# Altium PCB receiver.PcbDoc
Units mm, origin at the board's own origin, x right, y up, seen from the top; angles counter-clockwise.
Board outline 67.6 x 51.9 mm, 2 copper layers (Top Layer, Bottom Layer), stack 1.671 mm thick; 9 components, 15 nets, 25 pads, 3 vias.
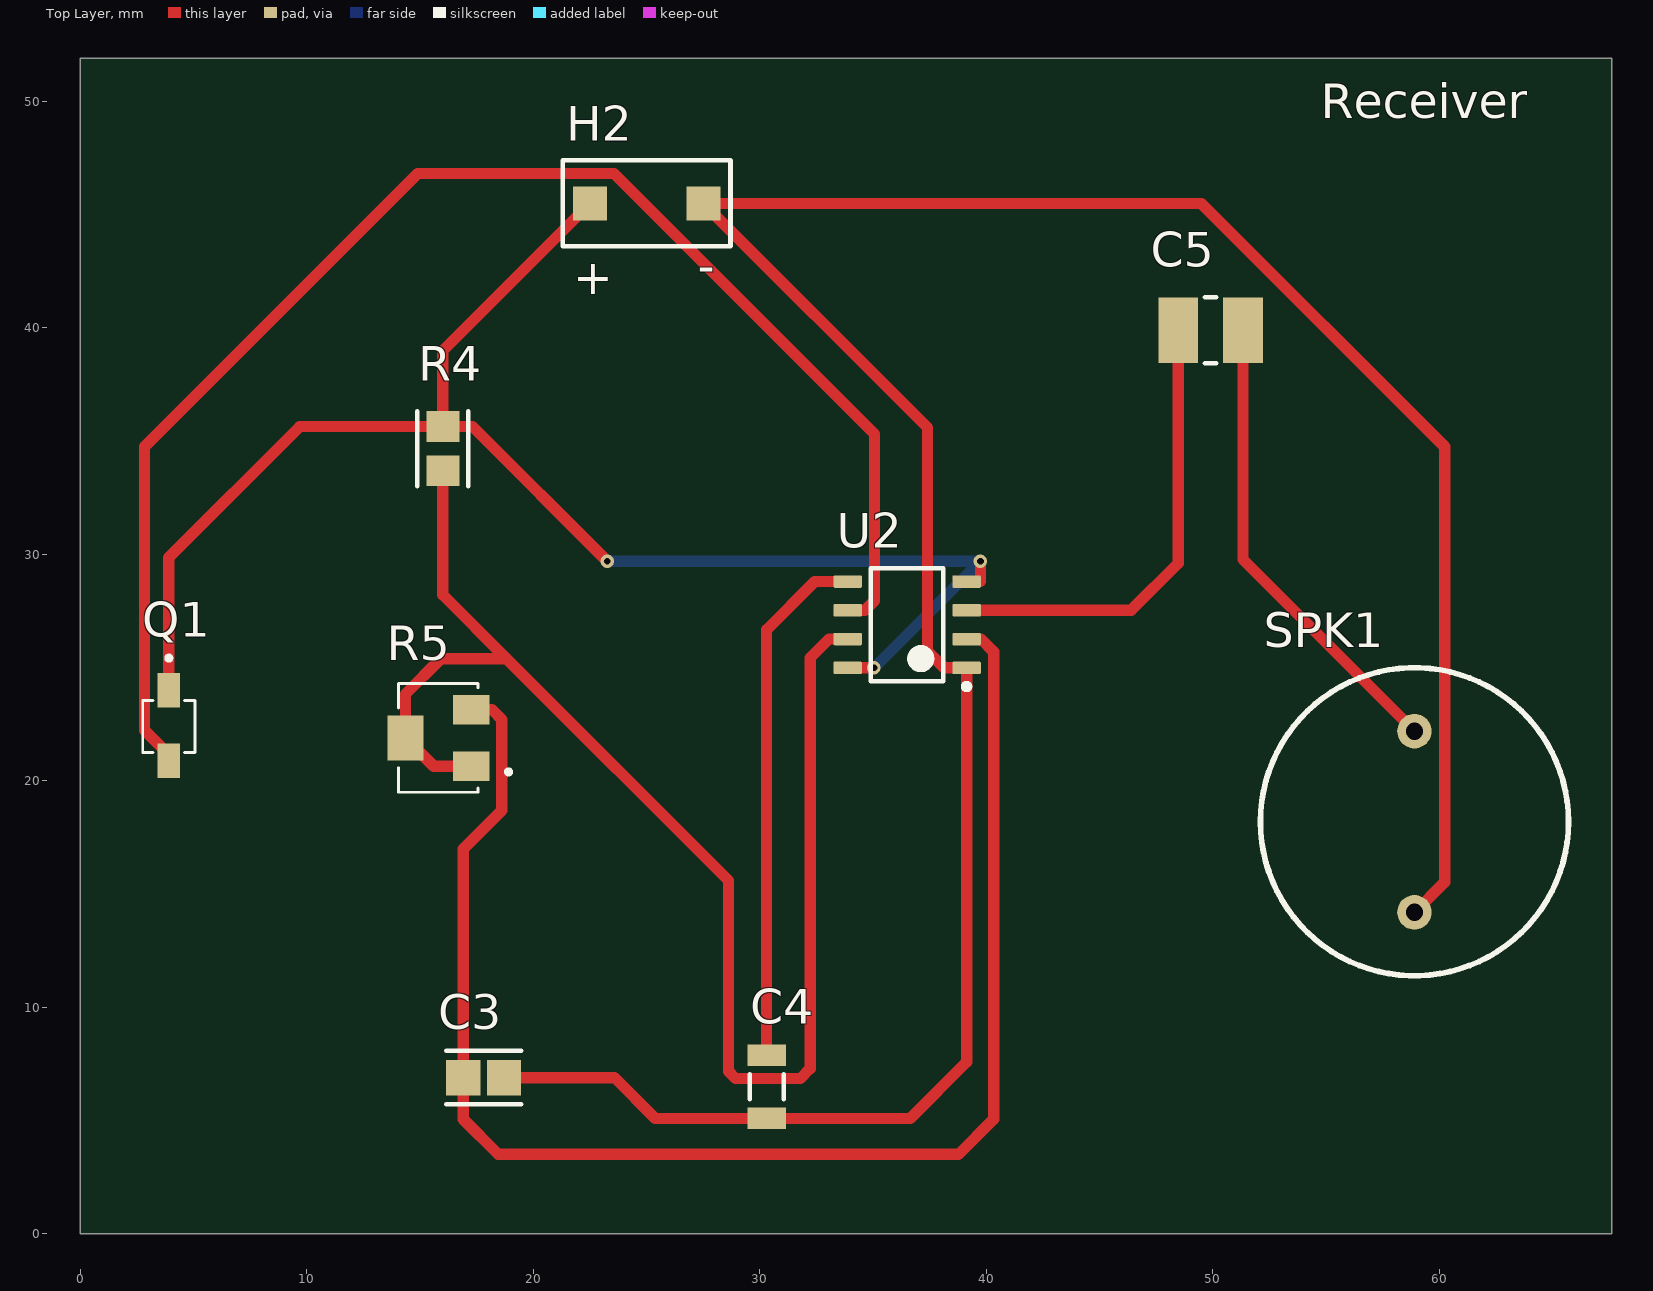
[diagram p0: Top Layer view]
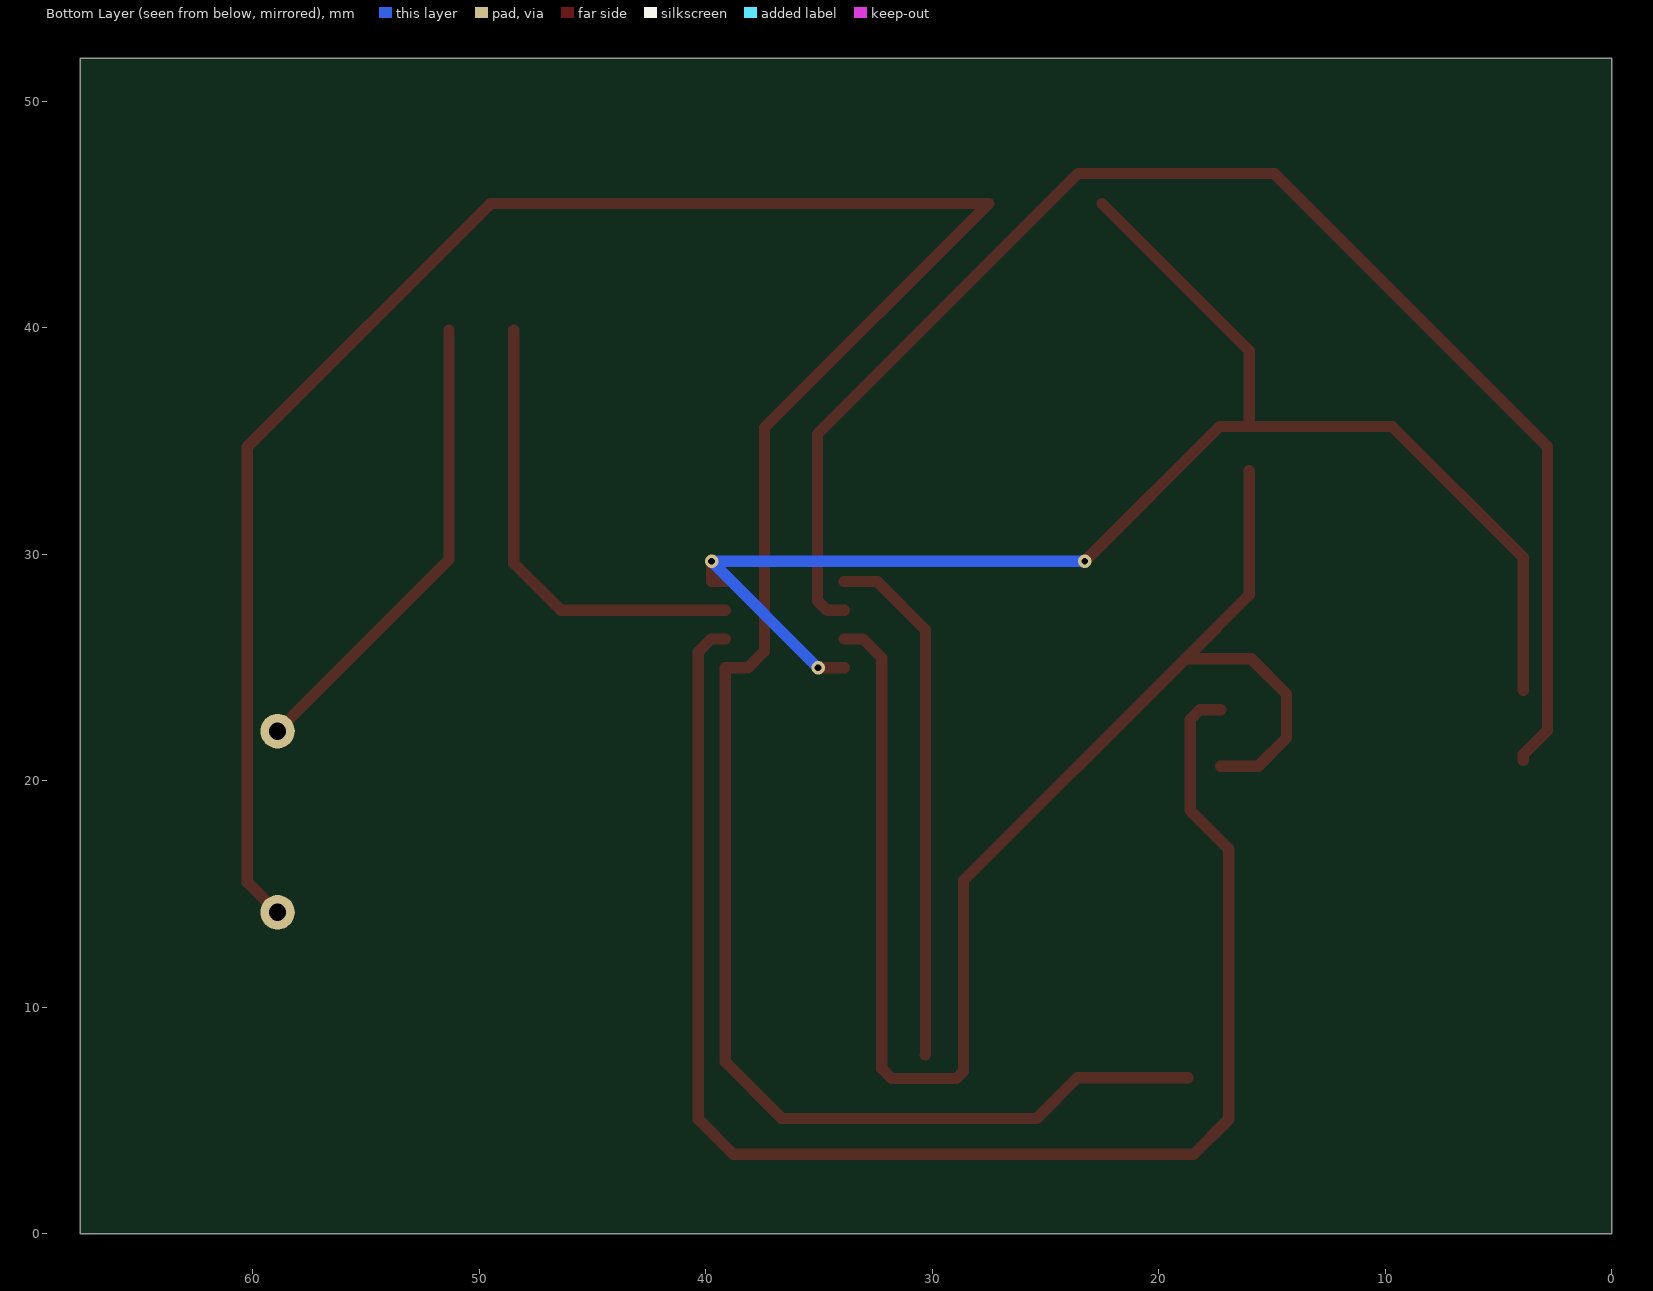
[diagram p1: Bottom Layer view, seen from below]
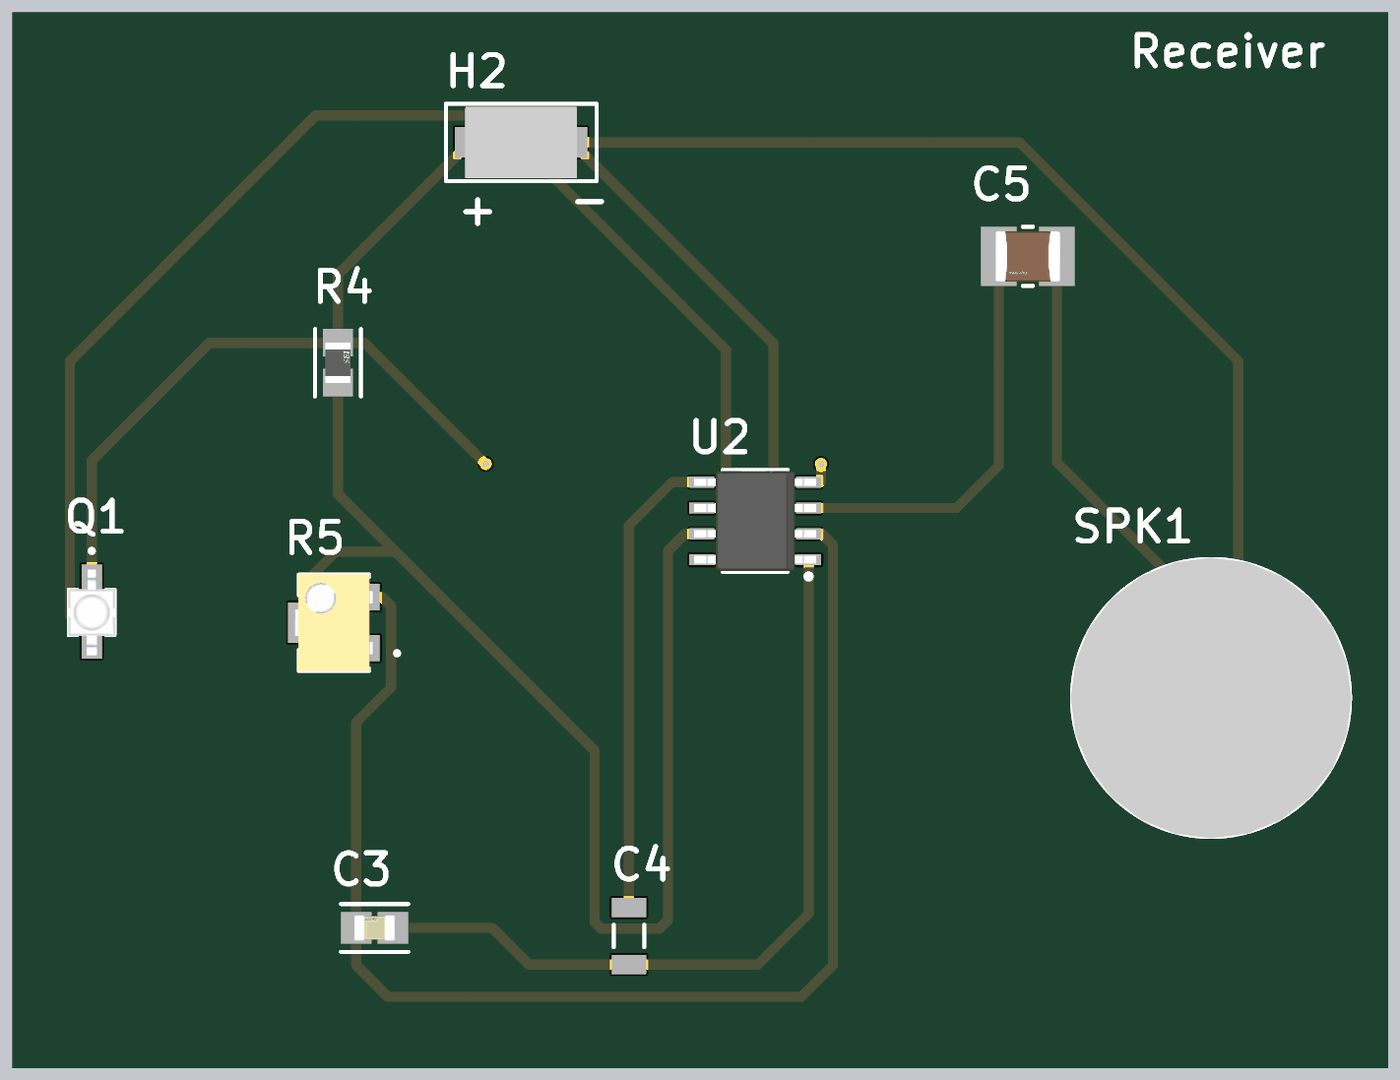
[diagram p2: 3D render of the assembled board from above, using the file's embedded part models]

## Layer stack, top to bottom
Top Solder: solder mask 0.0102, Solder Resist, Dk 3.5
Top Layer: signal copper 0.0356
Dielectric 1: dielectric 1.6, FR-4, Dk 4.8
Bottom Layer: signal copper 0.0356
Bottom Solder: solder mask 0.0102, Solder Resist, Dk 3.5

## Board outline
0,0 67.6,0 67.6,51.9 0,51.9

## Design rules (kind name [scope] priority, off if disabled: settings)
Clearance [All] p1: gap=0.3 ignorepadtopadclearanceinfootprint=FALSE
PolygonConnect [All] p1: connectstyle=Relief reliefconductorwidth=0.254 reliefentries=4 polygonreliefangle="90 Angle" airgapwidth=0.254
RoutingVias [All] p1: holewidth=0.3 width=0.6 viastyle="Through Hole" minholewidth=0.3 minwidth=0.6 maxholewidth=0.3 maxwidth=0.6
SolderMaskExpansion [All] p1: expansion=0.102 istentingtop=FALSE
Width [All] p1: maxlimit=1 minlimit=0.3 preferedwidth=0.5
30 further rules are at their usual default settings.

## Components (designator, comment, footprint, x,y, rotation, side; value= is the part's Value field where it differs from the comment)
C3 "0.05uF" FP-C0805C-DN-IPC_A 17.8,6.9 r0 top value="56,000 pF"
C4 "0.01uF" CAPC1206(3216)100_L 30.3,6.5 r90 top value=10nF
C5 "100uF" FP-EMK325A-M-IPC_A 49.9,39.9 r180 top
H2 "battery" bat 25,45.5 r0 top
Q1 "NPN PHOTO" XDCR_VEMT2523X01 3.9,22.4 r270 top
R4 "10k" FP-RMCF0805-IPC_A 16,34.676 r90 top
R5 "50k" TRIM_PVG5A503C03R00 15.8,21.9 r180 top
SPK1 "SP-3005-1Y" PCBComponent_1 58.9,18.2 r270 top
U2 "NE555" D0008A_L 36.5,26.9 r180 top

## Footprints (in the part's own frame and the unit in brackets; to place one, negate y for a bottom-side part, rotate by r counter-clockwise, add the part's x,y. Pads: shape width x height; smd on the part's side, far side on the other; paste and mask are expansions set on the pad)
bat [mm]
  rect 1.5x1.5 smd: 1(-2.5,0) 2(2.5,0)
  silkscreen extent -3.7,-1.9 3.7,1.9, body extent -2.75,-1.75 2.75,1.75, height 7
CAPC1206(3216)100_L [mm] "Chip Capacitor, Body 3.2x1.6mm, Height 1mm, IPC High Density"
  rect 0.95x1.7 smd: 1(-1.4,0) 2(1.4,0)
  silkscreen extent -0.55,-0.75 0.55,0.75, body extent -1.7,-0.9 1.7,0.9, height 1
D0008A_L [mm] "SOIC, 8-Leads, Body 5x4mm, Pitch 1.27mm, IPC High Density"
  rrect18% 1.25x0.55 smd: 1(-2.625,1.905) 2(-2.625,0.635) 3(-2.625,-0.635) 4(-2.625,-1.905) 5(2.625,-1.905) 6(2.625,-0.635) 7(2.625,0.635) 8(2.625,1.905)
  silkscreen extent -2.75,-2.5 1.6,2.85, body extent -3,-2.45 3,2.45, height 1.63
FP-C0805C-DN-IPC_A [mm]
  rect 1.505x1.556 smd paste+0 mask+0: 1(-0.901,0) 2(0.901,0)
  silkscreen extent -1.65,-1.18 1.65,1.18, body extent -2.15,-1.28 2.15,1.28, height 0.25
FP-EMK325A-M-IPC_A [mm]
  rect 1.753x2.904 smd paste+0 mask+0: 1(-1.425,0) 2(1.425,0)
  silkscreen extent -0.25,-1.45 0.25,1.45, body extent -2.8,-1.95 2.8,1.95, height 0.25
FP-RMCF0805-IPC_A [mm]
  rect 1.355x1.462 smd paste+0 mask+0: 1(-0.976,0) 2(0.976,0)
  silkscreen extent -1.65,-1.13 1.65,1.13, body extent -2.15,-1.23 2.15,1.23, height 0.25
PCBComponent_1 [mil]
  round 60 hole 30: 1(-157.48,0) 2(157.48,0)
  silkscreen extent -268,-268 268,268, body extent -272,-272 272,272, height 295
TRIM_PVG5A503C03R00 [mm]
  rect 1.6x1.3 smd: 1(-1.45,1.25) 3(-1.45,-1.25)
  rect 1.6x2 smd: 2(1.45,0)
  silkscreen extent -3.2,-2.4 1.75,2.4, body extent -1.95,-2.4 1.95,2.4, height 5.3
XDCR_VEMT2523X01 [mm]
  rect 1.524x1 smd: 1(-1.6,0) 2(1.5,0)
  silkscreen extent -3.12,-1.15 1.15,1.15, body extent -2.1,-1.15 2.1,1.15, height 2.8

## Part data
C3: library part C0805C563K5RACTU, "CAP CER 0.056UF 50V 10% X7R 0805", Capacitance="56,000 pF", Manufacturer=KEMET, Package=C0805C-DN, Supplier Part Number 1=399-8107-1-ND, Temperature="-55°C to +125°C", Temperature Characteristic=X7R, Temperature Coefficient=30ppm/°C, Temperature Range High=+125°C, Temperature Range Low=-55°C, Tolerance=0.1, Voltage Rating="50 V", Automotive=No, Category="Ceramic Capacitors", ComponentLink2Description=Datasheet, ComponentLink2URL=https://content.kemet.com/datasheets/KEM_C1003_C0G_SMD.pdf, Device Class L1="Passive Components", Device Class L2=Capacitors, Device Class L3="Ceramic Capacitors", Digikey Description="CAP CER 0.056UF 50V 10% X7R 0805", Height=0.88mm, Ipc Land Pattern Name=CAPC200125X78, Lead Free=Yes, Manufacturer Part Number=C0805C563K5RACTU, Material=Ceramic, Mouser Description="Cap Ceramic 0.056uF 50V X7R 10% SMD 0805 125°C Paper T/R", Octopart=https://octopart.com/c0805c563k5ractu-kemet-10470779, RoHS=TRUE, Supplier 1=Digi-Key
C4: library part C1206C103K5RAC7025, "Cap Ceramic 0.01uF 50V X7R 10% SMD 1206 125°C Plastic T/R", Case-EIA=1206, Case-Metric=3216, Rated Voltage="50 V", Supplier Part Number 1=399-17657-1-ND, Tolerance=Â±10%, Category="Ceramic Capacitors", Max Thickness="1 mm", Supplier 1=Digi-Key, Technology=SMT
C5: library part EMK325ABJ107MM-T, "CAP CER 100UF 16V X5R 1210", Manufacturer="Taiyo Yuden", Package=EMK325A-M, Supplier Part Number 1=587-3152-1-ND, Temperature="-55°C to +85°C", Temperature Characteristic=X5R, Temperature Coefficient=15%, Temperature Range High=+85°C, Temperature Range Low=-55°C, Tolerance=20%, Voltage Rating=16V, Automotive=No, Capacitance=100uF, Category="Ceramic Capacitors", ComponentLink2Description=Datasheet, ComponentLink2URL=https://www.yuden.co.jp/productdata/catalog/mlcc01_e.pdf, Device Class L1="Passive Components", Device Class L2=Capacitors, Device Class L3="Ceramic Capacitors", Digikey Description="CAP CER 100UF 16V X5R 1210", Height=2.8mm, Ipc Land Pattern Name=CAPC320250X250, Lead Free=Yes, Manufacturer Part Number=EMK325ABJ107MM-T, Material=Ceramic, Mouser Description="1210 100 uF 16 V ±20% Tolerance X5R SMT Multilayer Ceramic Capacitor", Octopart=https://octopart.com/emk325abj107mm-t-taiyo+yuden-20815747, RoHS=TRUE, Supplier 1=Digi-Key
Q1: library part VEMT2523X01, "PHOTOTRANSISTOR 470 TO 1090 NM", Package=None, Supplier Part Number 1=VEMT2523X01CT-ND, Availability=Unavailable, Category="Optical Sensors - Phototransistors", MP=VEMT2523X01, Price=None, Supplier 1=Digi-Key
R4: library part RMCF0805JT10K0, "10kΩ ±5% 0.125W 0805 Thick Film Chip Resistor AEC-Q200 compliant", Case Code (Imperial)=0805, Case Code (Metric)=2012, Max Operating Temperature=155°C, Max Power Dissipation=125mW, Min Operating Temperature=-55°C, Resistance=10kR, Resistor Type="Thick Film", Supplier Part Number 1=RMCF0805JT10K0CT-ND, Temperature Coefficient=100ppm/°C, Tolerance=5%, Case/Package=0805, Category="Chip Resistor - Surface Mount", Construction=Rectangular, Contact Plating=Tin, Depth=1.25mm, Features="Automotive AEC-Q200", Height=0.026inch, Lead Free="Lead Free", Length=2mm, Military Standard=Not, Mount="Surface Mount", Number of Terminations=2, Packaging="Tape and Reel", Power Rating=125mW, Radiation Hardening=No, RoHS Compliant=Yes, Series=RMCF, Size Code=0805, Supplier 1=Digi-Key, Width=0.049inch
R5: library part PVG5A503C03R00, "50 kOhms 0.25W, 1/4W J Lead Surface Mount Trimmer Potentiometer Cermet 11 Turn Top Adjustment", Package="SMD-3 Bourns", Supplier Part Number 1=490-2673-1-ND, Category="Potentiometers, Variable Resistors", Digi-Key_Part_Number=490-2673-1-ND, MF=Bourns, MP=PVG5A503C03R00, SnapEDA_Link=https://www.snapeda.com/parts/PVG5A503C03R00/Bourns/view-part/1439221/?ref=snap, Supplier 1=Digi-Key
SPK1: "SPEAKER, 92DB SENSITIVITY, 30MM", Manufacturer=Soberton, Supplier Part Number 1=2056-MB14-12V-ND, Category=Speakers, Manufacturer Part Number=SP-3005-1Y, Pricing 1="1=1,66000, 10=1,38000, 25=1,27600, 40=1,19975, 100=1,12650, 500=0,96694, 1000=0,94430 (USD)", RoHS=No, Stock 1=560, Supplier 1=Digi-Key
U2: library part NE555D, "Precision Timer, 4.5 to 16 V, 0 to 70 degC, 8-Pin SOIC (D), Green (RoHS & no Sb/Br), Tube", Digital IC Case Style=SOIC, Frequency=500kHz, IC Temperature Range=Commercial, Manufacturer="Texas Instruments", Operating Frequency Max=0.5MHz, Operating Mode=Astable,Monostable, Operating Temperature Max=70°C, Operating Temperature Min=0°C, Operating Temperature Range=0°Cto+70°C, Package Description="8-Pin Small Outline Integrated Circuit, Body 4.9 x 3.9 mm, Pitch 1.27 mm", Package Reference=D8, Supplier Part Number 1=296-16792-ND, Supply Voltage Max=16V, Supply Voltage Min=4.5V, Supply Voltage Range=4.5Vto16V, Base Number=555, Category="Clock/Timing - Programmable Timers and Oscillators", Clock External Input=No, Datasheet URL=http://www.ti.com/general/docs/lit/getliterature.tsp?genericPartNumber=NE555&fileType=pdf, Datasheet Version="Rev. I, 09/2014", Device Marking=NE555D, IC Generic Number=555, Logic Function Number=555, Manufacturer URL=http://www.ti.com/, Mounting Technology=SurfaceMount, No. of Channels=1, No. of Pins=8, No. of Timers=1, Package / Case=SOIC, Package URL=http://www.ti.com/lit/ml/msoi002j/msoi002j.pdf, PartNumber=NE555, Supplier 1=Digi-Key, SVHC=NoSVHC(19-Dec-2012)

## Via types
v1: diameter 0.6, hole 0.3, Top Layer to Bottom Layer, 3 vias

## Nets (pads, with @x,y where several pads share a name; then routed paths per layer and width w, separated by ;. In a path a pad name is that pad's centre, name@x,y a point inside that pad or via, vN(x,y) a via of type N, cw(c..) or ccw(c..) an arc to the next point about the centre after c; other vN are vias at no path point)
GND: C3.2 C4.1 H2.2 SPK1.2 U2.1 | length 123.8
  Top Layer w0.5: C3.2 23.581,6.9 25.381,5.1 C4.1 36.636,5.1 39.126,7.589 U2.1 ; U2.1 38.135,24.995 37.398,25.732 37.398,35.602 H2.2 49.488,45.5 60.233,34.755 60.233,15.533 SPK1.2
NetC1_1: 
NetC1_2: 
NetC2_2: 
NetC3_1: C3.1 R5.3 U2.2 | length 66.7
  Top Layer w0.5: R5.3 18.167,23.15 18.602,22.715 18.602,18.702 16.899,16.999 C3.1 16.899,5.063 18.45,3.513 38.77,3.513 40.319,5.062 40.319,25.706 39.761,26.265 U2.2
NetC4_2: C4.2 U2.5 | length 23.3
  Top Layer w0.5: C4.2 30.286,7.9 30.286,26.671 32.42,28.805 U2.5
NetC5_1: C5.1 SPK1.1 | length 20.8
  Top Layer w0.5: C5.1 51.325,29.775 SPK1.1
NetC5_2: C5.2 U2.3 | length 20.5
  Top Layer w0.5: U2.3 46.39,27.535 48.474,29.619 C5.2
NetD1_2: 
NetH1_1: 
NetH2_1: H2.1 Q1.1 R4.2 U2.4 U2.8 | length 68.4
  Top Layer w0.5: Q1.1 3.9,29.865 9.687,35.652 R4.2 ; H2.1 16,39 R4.2 ; v1(23.259,29.7) 17.307,35.652 R4.2 ; U2.8 v1(35.03,24.995) ; U2.4 39.735,28.805 v1(39.735,29.7)
  Bottom Layer w0.5: v1(23.259,29.7) v1(39.735,29.7) v1(35.03,24.995)
NetQ1_2: Q1.2 U2.6 | length 65
  Top Layer w0.5: Q1.2 3.9,21.166 2.829,22.237 2.829,34.755 14.894,46.82 23.556,46.82 35.062,35.314 35.062,27.954 34.643,27.535 U2.6
NetR1_1: 
NetR3_1: 
NetR4_1: R4.1 R5.1 R5.2 U2.7 | length 66.3
  Top Layer w0.5: R4.1 16,28.213 18.816,25.397 ; R5.1 15.6,20.65 R5.2 14.35,23.837 15.91,25.397 18.816,25.397 ; U2.7 33.055,26.265 32.217,25.427 32.217,7.297 31.785,6.865 28.928,6.865 28.61,7.183 28.61,15.603 18.816,25.397

## Silkscreen, mask and mechanical layers (free items; w line width, h text height)
Top Overlay:
  text "Receiver" at 54.754,49.254 h1.52
  text "-" at 27.254,41.992 h1.52
  text "+" at 21.754,41.5 h1.52